# Altium PCB GCIT_1.0.PcbDoc
Units mm, origin at the board's own origin, x right, y up, seen from the top; angles counter-clockwise.
Board outline 105.03 x 70.03 mm, 2 copper layers (Top Layer, Bottom Layer); 63 components, 45 nets, 210 pads, 462 vias.
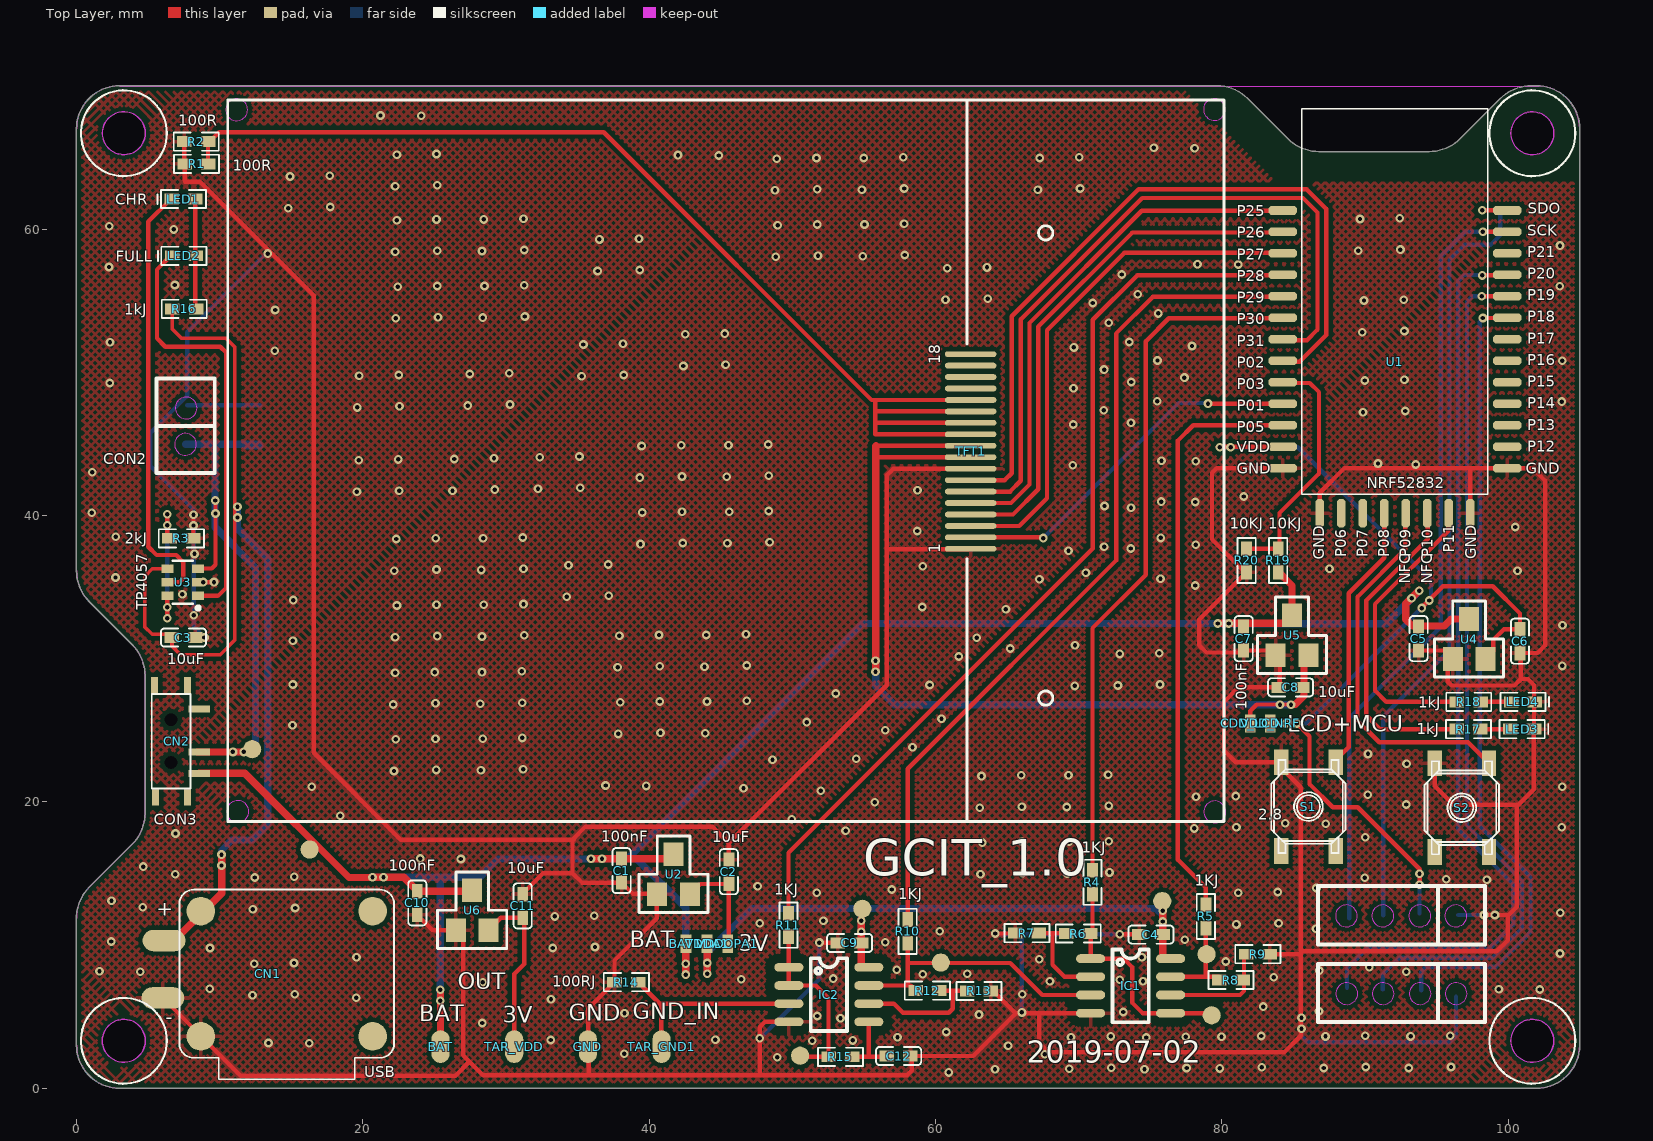
[diagram p0: Top Layer view]
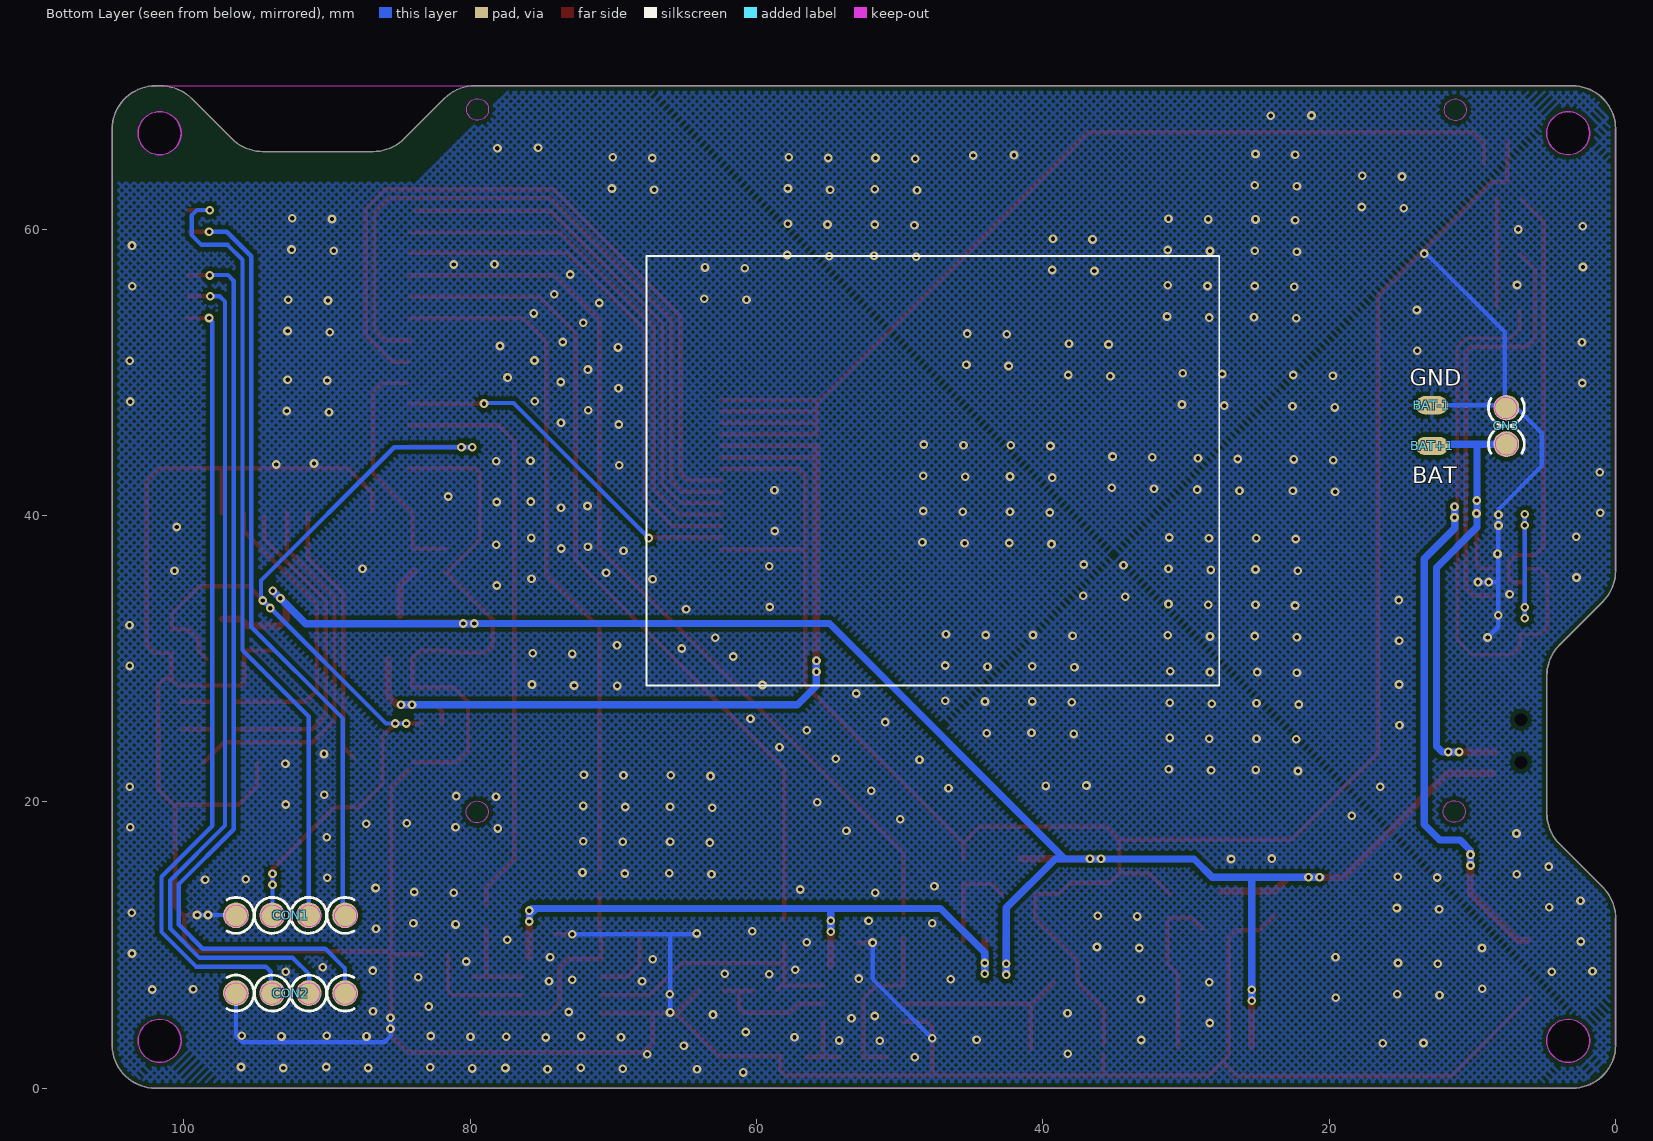
[diagram p1: Bottom Layer view, seen from below]

## Layer stack, top to bottom
Top Layer: signal copper 0.0356
Dielectric: dielectric 0.32, FR-4, Dk 4.8
Bottom Layer: signal copper 0.0356

## Board outline
-0.016,3 ccw(c2.997,3) 2.997,-0.013 101.992,-0.013 ccw(c102,-0.003) 102,-0.016 ccw(c102,2.997) 105.012,2.916 ccw(c105,2.921) 105.013,2.921 105.013,66.991 ccw(c105.004,67) 105.017,67 ccw(c102.004,67) 102.004,70.013 101.623,70.013 ccw(c101.623,66.934) 99.446,69.111 96.647,66.312 cw(c94.488,68.471) 94.488,65.418 86.789,65.418 cw(c86.789,68.471) 84.631,66.312 81.83,69.113 ccw(c79.653,66.936) 79.653,70.015 ccw(c79.653,66.936) 79.653,70.015 cw(c79.653,70.002) 79.653,70.015 3.01,70.013 ccw(c3,70.005) 3,70.018 ccw(c3,67.005) -0.013,67.005 -0.013,36.144 ccw(c3.066,36.144) 0.889,33.967 3.893,30.962 cw(c1.735,28.804) 4.788,28.804 4.788,19.202 cw(c1.735,19.202) 3.893,17.044 0.886,14.036 ccw(c3.063,11.859) -0.016,11.859
cut-out: 103.201,3.297 cw(c101.701,3.297) 101.701,1.797 cw(c101.701,3.297) 100.201,3.297 cw(c101.701,3.297) 101.701,4.797 cw(c101.701,3.297)
cut-out: 101.704,68.201 cw(c101.704,66.701) 103.204,66.701 cw(c101.704,66.701) 101.704,65.201 cw(c101.704,66.701) 100.204,66.701 cw(c101.704,66.701)
cut-out: 1.799,66.705 cw(c3.299,66.705) 3.299,68.205 cw(c3.299,66.705) 4.799,66.705 cw(c3.299,66.705) 3.299,65.205 cw(c3.299,66.705)
cut-out: 3.297,1.799 cw(c3.297,3.299) 1.797,3.299 cw(c3.297,3.299) 3.297,4.799 cw(c3.297,3.299) 4.797,3.299 cw(c3.297,3.299)

## Design rules (kind name [scope] priority, off if disabled: settings)
Clearance Clearance_1 [(InComponent('IC1') OR InComponent('IC2'))] p1: gap=0.635
Clearance [All] p2: gap=0.305
ComponentClearance [All] p1 off: gap=0.254 collisioncheckmode=3 verticalgap=0.254 showdistances=FALSE
MinimumSolderMaskSliver [All] p1 off: minsoldermaskwidth=0.254
PolygonConnect PolygonConnect_1 [isVia] p1: connectstyle=Direct reliefconductorwidth=0.254 reliefentries=4 polygonreliefangle="90 Angle"
PolygonConnect [All] p2: connectstyle=Relief reliefconductorwidth=0.254 reliefentries=4 polygonreliefangle="90 Angle"
RoutingVias [All] p1: holewidth=0.305 width=0.61 viastyle="Through Hole" minholewidth=0.305 minwidth=0.61 maxholewidth=0.305 maxwidth=0.61
SilkscreenOverComponentPads [All] p1 off: minsilkscreentomaskgap=0.254
SolderMaskExpansion [All] p1 off: expansion=0.102
Width [All] p1: maxlimit=0.762 minlimit=0.152 preferedwidth=0.305
25 further rules are at their usual default settings.

## Components (designator, comment, footprint, x,y, rotation, side; value= is the part's Value field where it differs from the comment)
BAT "" BAT_PAD#1 25.425,2.896 r0 top
BAT1 "" BAT_PAD#2 42.57,10.084 r0 top
BAT+1 "" BAT_PAD#1 12.802,44.856 r270 bottom
BAT-1 "" BAT_PAD#1 12.827,47.701 r270 bottom
C1 "100nF" 0603C 38.075,15.189 r90 top
C2 "10uF" 0603C 45.568,15.113 r270 top
C3 "10uF" 0603C 7.468,31.471 r0 top
C4 "100nF" 0603C 75.057,10.719 r0 top
C5 "100nF" 0603C 93.751,31.394 r90 top
C6 "10uF" 0603C 100.838,31.217 r90 top
C7 "100nF" 0603C 81.534,31.394 r90 top
C8 "10uF" 0603C 84.811,27.991 r0 top
C9 "100nF" 0603C 54,10.135 r0 top
C10 "100nF" 0603C 23.8,12.929 r90 top
C11 "10uF" 0603C 31.166,12.725 r270 top
C12 "10uF" 0603C 57.429,2.235 r180 top
CDD_LCD "" BAT_PAD#2 81.991,25.476 r180 top
CN1 "USB" USB 14.681,7.112 r90 top
CN2 "CON3" MSK-12C01-07 6.604,24.232 r270 top
CN3 "CON2" SIP-2P 7.62,46.253 r90 top
CON1 "CON4" SIP-4P 92.558,12.065 r180 top
CON2 "CON4" SIP-4P 92.558,6.629 r180 top
GND "" BAT_PAD#1 35.721,2.896 r0 top
IC1 "AD8629" SO-8 73.635,7.137 r270 top
IC2 "AD8629" SO-8 52.553,6.528 r270 top
LED1 "CHR" 0603LED 7.468,62.103 r180 top
LED2 "FULL" 0603LED 7.493,58.141 r180 top
LED3 "CHR" 0603LED 100.99,25.07 r0 top
LED4 "[]" 0603LED 101.041,26.975 r0 top
R1 "100R" 0603R 8.382,64.567 r0 top
R2 "100R" 0603R 8.357,66.116 r0 top
R3 "2kJ" 0603R 7.315,38.405 r0 top
R4 "1KJ" 0603R 70.968,14.376 r90 top
R5 "1KJ" 0603R 78.892,11.989 r90 top
R6 "100RJ" 0603R 69.977,10.795 r0 top
R7 "100RJ" 0603R 66.396,10.82 r0 top
R8 "100RJ" 0603R 80.645,7.544 r180 top
R9 "100RJ" 0603R 82.525,9.347 r180 top
R10 "1KJ" 0603R 58.064,10.947 r90 top
R11 "1KJ" 0603R 49.733,11.379 r90 top
R12 "100RJ" 0603R 59.436,6.807 r180 top
R13 "100RJ" 0603R 63.043,6.782 r180 top
R14 "100RJ" 0603R 38.405,7.391 r180 top
R15 "1KJ" 0603R 53.365,2.184 r0 top
R16 "1kJ" 0603R 7.518,54.432 r0 top
R17 "1kJ" 0603R 97.231,25.07 r0 top
R18 "1kJ" 0603R 97.257,26.975 r0 top
R19 "10KJ" 0603R 83.947,36.855 r270 top
R20 "10KJ" 0603R 81.737,36.855 r90 top
S1 "SW DPST" key4x4 86.055,19.66 r270 top
S2 "SW DPST" key4x4 96.774,19.583 r270 top
TAR_GND1 "" DEBUG_PAD 40.869,2.896 r180 top
TAR_VDD "" BAT_PAD#1 30.573,2.896 r180 top
TFT1 "2.8" TFT2.8-ZHA 80.162,18.618 r90 top
U1 "NRF52832" NRF52832_MODEL 92.1,43.307 r0 top
U2 "XC6206P302MR" SOT-23-S-LDO 41.707,14.935 r0 top
U3 "TP4057" SOT23-6-SMALL 7.417,35.331 r90 top
U4 "XC6206P302MR" SOT-23-S-LDO 97.282,31.369 r0 top
U5 "XC6206P302MR" SOT-23-S-LDO 84.912,31.623 r0 top
U6 "XC6206P302MR" SOT-23-S-LDO 27.635,12.421 r0 top
VDD_NRF "" BAT_PAD#2 83.388,25.476 r180 top
VDDA1 "" BAT_PAD#2 44.044,10.084 r180 top
VDDOPA1 "" BAT_PAD#2 45.491,10.084 r180 top

## Footprints (in the part's own frame and the unit in brackets; to place one, negate y for a bottom-side part, rotate by r counter-clockwise, add the part's x,y. Pads: shape width x height; smd on the part's side, far side on the other; paste and mask are expansions set on the pad)
0603C [mil]
  rect 40x30 smd: 1(-32.5,0) 2(32.5,0)
  silkscreen extent -62,-25 62,25
0603LED [mil]
  rect 40x30 smd: A(-32.5,0) K(32.5,0)
  silkscreen extent -62,-25 72,25
0603R [mil]
  rect 40x30 smd: 1(-32.5,0) 2(32.5,0)
  silkscreen extent -62,-25 62,25
BAT_PAD#1 [mil] "side_half_hole"
  oval 50x90 smd: 1(0,0)
BAT_PAD#2 [mil] "side_half_hole"
  rect 30x50 smd: 1(0,0)
DEBUG_PAD [mil] "side_half_hole"
  oval 50x90 smd: 1(0,0)
key4x4 [mm]
  rect 1.8x1 smd: 1(-3.1,1.9) 2(-3.1,-1.9) 3(3.1,1.9) 4(3.1,-1.9)
  silkscreen extent -3.25,-2.6 3.25,2.6
MSK-12C01-07 [mm]
  rect 1.2x0.5 smd: 0(-3.9,-1.15) 0(-3.9,1.15) 0(3.9,1.15) 0(3.9,-1.1)
  round 0 hole 0.9: 0(-1.5,0) 0(1.5,0)
  rect 0.5x1.5 smd: 1(-2.25,1.95) 2(0.75,1.95) 3(2.25,1.95)
  silkscreen extent -3.3,-1.35 3.3,1.35
NRF52832_MODEL [mm]
  oct 2x0.6 smd: 1(-7.85,18) 2(-7.85,16.499) 3(-7.85,14.998) 4(-7.85,13.497) 5(-7.85,11.996) 6(-7.85,10.495) 7(-7.85,8.994) 8(-7.85,7.493) 9(-7.85,5.992) 10(-7.85,4.492) 11(-7.85,2.991) 12(-7.85,1.49) 13(-7.85,-0.011) 22(7.85,0) 23(7.85,1.5) 24(7.85,3) 25(7.85,4.5) 26(7.85,6) 27(7.85,7.5) 28(7.85,9) 29(7.85,10.5) 30(7.85,12) 31(7.85,13.5) 32(7.85,15) 33(7.85,16.5) 34(7.85,18)
  oct 0.6x2 smd: 14(-5.25,-3.16) 15(-3.75,-3.16) 16(-2.25,-3.16) 17(-0.75,-3.16) 18(0.75,-3.16) 19(2.25,-3.16) 20(3.75,-3.16) 21(5.25,-3.16)
  silkscreen extent -6.5,-1.81 6.5,25.09
SIP-2P [mm]
  round 1.8 smd far side: 1(-1.27,0) 2(1.27,0)
  silkscreen extent -3.3,-2.03 3.3,2.03
SIP-4P [mm]
  round 1.8 smd far side: 1(-3.81,0) 2(-1.27,0) 3(1.27,0) 4(3.81,0)
  silkscreen extent -5.84,-2.03 5.84,2.03
SO-8 [mil]
  oval 24x80 smd: 1(-75,-110) 2(-25,-110) 3(25,-110) 4(75,-110) 5(75,110) 6(25,110) 7(-25,110) 8(-75,110)
  silkscreen extent -100,-50 100,50
SOT23-6-SMALL [mm] "SOT23, 3-Leads, Body 2.9x1.3mm, Pitch 0.95mm, Lead Span 2.4mm, IPC High Density"
  rect 0.6x0.85 smd: 1(-0.95,-1.075) 2(0,-1.075) 3(0.95,-1.075) 4(0.95,1.075) 5(0,1.075) 6(-0.95,1.075)
  silkscreen extent -1.92,-1.2 1.5,0.7, body extent -1.5,-0.7 1.5,0.7, height 1.14
SOT-23-S-LDO [mil]
  rect 55x65 smd: GND(-45,-55) Vin(0,55) Vout(45,-55)
  silkscreen extent -95,-105 95,105
TFT2.8-ZHA [mm]
  oval 0.4x3.6 smd: 1(19.05,17.704) 2(19.85,17.704) 3(20.65,17.704) 4(21.45,17.704) 5(22.25,17.704) 6(23.05,17.704) 7(23.85,17.704) 8(24.65,17.704) 9(25.45,17.704) 10(26.25,17.704) 11(27.05,17.704) 12(27.85,17.704) 13(28.65,17.704) 14(29.45,17.704) 15(30.25,17.704) 16(31.05,17.704) 17(31.85,17.704) 18(32.65,17.704)
  silkscreen extent 0,0 50.4,69.6
USB [mm]
  round 2 smd: 0(-3.503,-6) 0(5.247,-6) 1(-3.503,6) 2(5.247,6)
  oval 1.5x3 smd: 1(-0.818,8.654) 2(3.19,8.567)
  silkscreen extent -6.5,-7.5 6.75,7.5

## Part data
BAT BAT1 BAT+1 BAT-1 CDD_LCD GND TAR_GND1 TAR_VDD VDD_NRF VDDA1 VDDOPA1: library part PAD
C1 C2 C3 C4 C5 C6 C7 C8 C9 C10 C11 C12: library part C0402-47n, "Capacitor, X7R, ?0%"
CN1: library part CON2, "Connector"
CN2 CN3 CON1 CON2: "Connector"
IC1 IC2: library part LM358
LED1 LED2 LED3 LED4: library part LED
R1 R2 R3 R4 R5 R6 R7 R8 R9 R10 R11 R12 R13 R14 R15 R16 R17 R18 R19 R20: library part RES2
TFT1: library part 18P
U2 U4 U5 U6: library part 7805
U3: library part DIP6

## Free pads (board coordinates)
  round 1.27 smd: 0(12.268,23.673) 0(16.281,16.662) 0(50.546,2.261) 0(54.889,12.522) 0(60.376,8.763) 0(75.844,13.056) 0(78.943,9.347) 0(79.299,5.08)

## Via types
v1: diameter 0.61, hole 0.305, Top Layer to Bottom Layer, tented both sides, 462 vias

## Nets (pads, with @x,y where several pads share a name; then routed paths per layer and width w, separated by ;. In a path a pad name is that pad's centre, name@x,y a point inside that pad or via, vN(x,y) a via of type N, cw(c..) or ccw(c..) an arc to the next point about the centre after c; other vN are vias at no path point)
5V: C3.1 CN1.2 R16.1 U3.4 | length 76.3
  Top Layer w0.254: U3.4 5.293,36.281 4.75,35.738 4.75,32.233 5.283,31.699 6.579,31.699 6.667,31.61 6.667,30.874 7.264,30.277 10.033,30.277 11.049,31.293 11.049,51.765 10.439,52.375 7.329,52.375 6.68,53.023 R16.1@6.68,54.356
  Top Layer w0.508: CN1.2@6.114,10.302 6.822,10.302 10.135,13.614 v1@10.135,16.307
  Bottom Layer w0.508: v1(10.122,15.545) 10.122,16.599 10.846,17.323 12.268,17.323 13.36,18.415 13.36,22.758 13.36,36.982 11.227,39.116 v1@11.227,40.691
  other v1: 10.122,16.307 11.239,39.853 11.239,40.615
AD1: R11.2 U1.4 | length 64.8
  Top Layer w0.305: R11.2 49.733,16.434 70.993,37.694 70.993,53.67 74.092,56.769 U1.4@84.277,56.769
AD2: R10.2 U1.5 | length 59.6
  Top Layer w0.305: R10.2 58.064,22.301 72.619,36.855 72.619,52.705 75.184,55.27 U1.5@84.201,55.27
AD3: R4.2 U1.6 | length 48.7
  Top Layer w0.305: R4.2 70.968,32.131 74.701,35.865 74.701,52.172 76.302,53.772 U1.6@84.226,53.772
AD4: R5.2 U1.11 | length 41
  Top Layer w0.305: R5.2 78.892,13.995 76.937,15.951 76.937,45.237 78.003,46.304 U1.11@84.277,46.304
AD_BAT: R19.1 R20.2 U1.9 | length 17
  Top Layer w0.305: R20.2 84.036,37.681 84.036,40.17 86.792,42.926 86.792,48.616 86.157,49.251 U1.9@84.43,49.251
BAT: BAT1.1 BAT.1 C1.2 C5.2 C7.2 C10.2 CN2.3 pad.0@16.281,16.662 R19.2 U2.Vin U4.Vin U5.Vin U6.Vin | length 151.6
  Top Layer w0.508: CN2.3 11.75,21.982 19.025,14.707 v1@21.488,14.707 ; v1@20.65,14.732 22.86,14.732 23.838,13.754 U6.Vin@27.521,13.754 ; BAT.1 v1@25.425,6.883 ; v1@35.89,16.015 U2.Vin@41.516,16.015 ; v1@42.558,7.874 BAT1.1@42.558,10.211 ; v1@79.68,32.461 U5.Vin@84.353,32.461 ; R19.2@83.922,36.093 84.912,35.103 U5.Vin ; v1@93.802,34.773 92.862,33.833 92.862,32.741 93.32,32.283 95.555,32.283 96.037,32.766 U4.Vin
  Bottom Layer w0.508: v1@20.549,14.732 28.169,14.732 29.439,16.002 39.141,16.002 42.558,12.586 v1(42.558,7.925) ; v1(25.413,6.096) 25.413,14.668 ; 38.481,16.027 54.902,32.448 v1(80.493,32.448) ; v1@79.68,32.436 91.492,32.436 v1(93.803,34.747)
  other v1: 25.413,6.858 42.558,8.687 20.676,14.719 21.438,14.719 35.941,16.015 36.703,16.015 79.731,32.448 93.264,34.208
BAT_REAL: BAT+1.1 CN2.2 CN3.1 pad.0@12.268,23.673 U3.3 | length 39.1
  Top Layer w0.305: U3.3@8.458,36.297 9.449,36.297 9.703,36.551 v1@9.703,41.097
  Top Layer w0.508: CN2.2@8.427,23.482 v1@11.594,23.482
  Bottom Layer w0.508: CN3.1 BAT+1.1@12.751,44.983 ; 9.677,44.907 9.677,39.167 12.497,36.347 12.497,23.876 12.103,23.482 v1(10.922,23.482) ; BAT+1.1@11.811,44.856 BAT+1.1
  other v1: 11.684,23.482 9.703,40.132 9.677,41.046
GND: BAT-1.1 C1.1 C2.1 C3.2 C4.1 C5.1 C6.1 C7.1 C8.1 C9.1 C10.1 C11.1 C12.1 CN1.1 CN3.2 CON1.1 CON2.1 GND.1 IC1.4 IC2.4 LED3.K LED4.K R1.1 R2.1 R3.2 R7.1 R9.1 R13.1 R14.2 R20.1 S1.2 S2.2 TFT1.1 TFT1.8 U1.13 U1.14 U1.21 U1.22 U2.GND U3.2 U4.GND U5.GND U6.GND | length 495.9
  Top Layer w0.305: CN1.1@6.027,6.294 11.458,0.864 26.467,0.864 27.432,1.829 ; R1.1@7.531,64.529 R2.1 ; 7.556,63.411 R1.1 ; 7.569,63.322 8.609,63.322 16.561,55.371 16.561,23.419 22.631,17.348 34.722,17.348 ; R3.2@8.166,38.379 v1@8.166,39.941 ; U3.2 v1@9.703,35.331 ; C10.1@23.825,12.065 24.867,11.024 U6.GND 27,10.516 27,2.286 28.397,0.889 35.789,0.889 ; C11.1@31.115,13.538 32.588,15.011 34.646,15.011 ; GND.1@35.738,3.048 35.738,5.55 R14.2 37.579,8.903 40.538,11.862 U2.GND@40.538,13.284 ; GND.1@35.789,2.362 35.789,0.889 ; C1.1@38.024,14.351 35.306,14.351 34.646,15.011 ; C1.1 38.875,13.564 U2.GND@40.488,13.564 ; C2.1 45.568,17.12 ; 47.727,0.914 v1(47.727,3.48) 47.727,4.256 48.094,4.623 IC2.4 ; v1(51.892,10.16) C9.1@52.857,10.16 ; 56.591,37.643 TFT1.1@62.459,37.643 ; C12.1 62.636,2.235 65.608,5.207 ; C12.1@58.344,2.261 58.344,1.219 58.014,0.889 35.789,0.889 ; TFT1.8 57.06,43.268 56.591,42.799 56.591,28.143 45.568,17.12 ; R13.1@63.983,6.833 65.583,5.232 IC1.4 ; v1(64.186,10.795) R7.1@65.761,10.795 ; 67.259,5.131 67.259,3.15 67.92,2.489 84.353,2.489 85.522,3.658 85.522,21.006 S1.2@84.328,22.2 ; v1(72.873,10.744) C4.1@74.066,10.744 ; R20.1@81.483,36.17 79.324,38.329 79.324,42.977 79.643,43.296 U1.13 ; C7.1@81.509,30.429 78.943,30.429 78.435,30.937 78.435,32.728 R20.1 ; C7.1 83.502,30.569 84.049,30.023 C8.1@84.049,28.042 ; R9.1 85.471,9.347 ; C8.1 81.178,27.991 80.162,26.975 80.162,23.571 80.975,22.758 S1.2@83.998,22.758 ; 85.598,9.55 99.212,9.55 99.974,10.312 99.974,12.014 ; U1.14@86.843,40.284 86.843,41.58 88.57,43.307 U1.22 ; C5.1 95.796,30.569 95.796,28.384 96.063,28.118 100.457,28.118 100.889,28.55 C6.1@100.889,30.226 ; S2.2 94.874,21.102 96.19,19.787 100.736,19.787 101.803,20.853 LED3.K@101.803,25.095 ; U1.21 97.35,43.223 ; v1@98.171,12.09 100.051,12.09 100.609,12.649 100.609,19.736 ; U1.22@100.178,43.307 101.727,43.307 102.591,42.443 102.591,30.912 102.07,30.391 C6.1 ; 100.889,28.575 101.397,28.575 101.816,28.156 LED3.K ; 34.646,15.011 34.646,17.348 35.56,18.263 44.425,18.263 45.568,17.12
  Bottom Layer w0.305: CN3.2@7.722,47.701 BAT-1.1 ; v1(8.166,40.056) 8.166,40.424 5.156,43.434 5.156,45.771 7.722,48.336 7.722,52.807 v1@13.259,58.344 ; v1@8.179,40.056 8.179,32.22 v1(8.928,31.471) ; 8.217,35.344 v1(9.601,35.344) ; v1@47.752,3.48 51.892,7.62 51.892,9.982 v1@51.816,10.058 ; v1@64.364,10.744 v1(72.873,10.744) ; v1(66.04,5.283) 66.04,10.668 ; v1(85.573,4.902) 85.573,3.632 86.004,3.2 95.91,3.2 96.368,3.658 CON2.1@96.368,6.375 ; CON1.1@96.52,12.09 v1(99.085,12.09)
  other v1: 60.935,1.092 64.16,1.321 74.6,1.321 69.342,1.346 79.858,1.372 77.546,1.397 87.122,1.397 93.066,1.397 72.288,1.422 82.804,1.448 90.068,1.473 96.012,1.473 48.946,2.159 67.64,2.362 38.252,2.388 65.075,2.946 16.256,3.124 13.411,3.15 51.384,3.302 54.229,3.327 33.122,3.353 44.628,3.378 74.727,3.531 57.353,3.556 69.469,3.556 77.495,3.581 79.985,3.581 72.238,3.607 87.249,3.607 93.193,3.607 82.753,3.632 90.018,3.658 95.961,3.658 60.757,3.912 85.573,4.14 28.346,4.547 53.365,4.877 51.74,5.029 63.043,5.131 38.278,5.232 73.127,5.309 86.792,5.359 82.906,5.69 33.147,6.198 19.533,6.299 12.294,6.477 15.24,6.553 66.065,6.553 102.21,6.883 99.365,6.909 9.296,6.934 28.372,7.391 67.996,7.468 74.498,7.468 72.873,7.569 46.431,7.595 52.857,7.645 83.642,7.747 59.106,7.95 62.23,7.976 4.445,8.128 92.888,8.128 1.6,8.153 86.817,8.204 57.302,8.255 90.297,8.433 12.421,8.687 15.189,8.738 80.289,8.839 67.259,8.992 19.558,9.144 74.422,9.144 103.632,9.398 9.322,9.779 33.274,9.779 36.22,9.855 56.49,10.185 2.413,10.236 77.419,10.363 60.3,10.947 86.589,11.125 81.026,11.43 47.727,11.506 83.972,11.506 52.172,11.684 33.401,11.989 36.17,12.04 98.323,12.09 103.657,12.243 12.319,12.497 15.265,12.573 4.623,12.624 2.438,13.081 51.714,13.64 81.153,13.64 83.922,13.691 56.947,13.868 86.614,13.97 47.574,14.097 98.527,14.554 95.682,14.58 89.992,14.681 12.446,14.707 15.215,14.757 6.883,14.935 63.144,14.935 69.215,14.986 66.091,15.011 72.161,15.062 4.648,15.469 26.848,16.002 24.003,16.027 63.271,17.145 66.04,17.196 69.342,17.196 72.111,17.247 90.018,17.526 6.909,17.78 53.723,17.971 78.08,18.136 81.026,18.212 103.759,18.212 87.274,18.466 84.43,18.491 49.964,18.784 18.415,19.025 63.094,19.583 69.164,19.634 66.04,19.66 72.111,19.71 92.888,19.812 55.753,19.964 78.207,20.345 80.975,20.396 90.195,20.498 51.994,20.777 46.586,20.943 16.421,21.054 103.784,21.057 39.802,21.107 36.957,21.133 63.221,21.793 65.989,21.844 69.291,21.844 72.06,21.895 22.174,22.149 28.245,22.2 25.121,22.225 31.191,22.276 92.913,22.657 48.616,22.936 54.46,23 90.221,23.343 58.397,23.813 22.301,24.359 25.07,24.409 28.372,24.409 31.14,24.46 37.846,24.74 43.917,24.79 40.792,24.816 56.49,24.994 15.088,25.349 51.006,25.565 60.427,25.806 22.123,26.797 28.194,26.848 25.07,26.873 31.14,26.924 37.973,26.949 40.742,27 44.044,27 46.812,27.051 53.035,27.559 69.723,28.092 72.746,28.118 59.591,28.156 15.113,28.194 75.692,28.194 22.25,29.007 25.019,29.058 28.321,29.058 31.09,29.108 37.795,29.388 43.866,29.439 40.742,29.464 103.784,29.489 46.812,29.515 61.62,30.15 72.873,30.328 75.641,30.378 65.227,30.709 69.748,30.937 15.113,31.242 62.893,31.458 22.25,31.496 28.321,31.547 25.197,31.572 37.922,31.598 31.267,31.623 40.691,31.648 43.993,31.648 46.761,31.699 103.81,32.334 8.179,33.02 64.922,33.452 59.08,33.604 22.377,33.706 25.146,33.757 28.448,33.757 31.217,33.807 15.138,34.087 34.239,34.315 37.186,34.392 7.391,34.493 78.156,35.103 8.839,35.344 67.262,35.548 75.717,35.585 2.718,35.662 70.51,35.992 22.2,36.144 100.66,36.144 28.27,36.195 25.146,36.22 31.217,36.271 87.528,36.271 59.106,36.449 34.366,36.525 37.135,36.576 8.241,37.314 69.291,37.541 73.635,37.694 71.78,37.821 78.181,37.948 39.395,37.998 45.466,38.049 42.342,38.075 48.412,38.125 22.327,38.354 25.095,38.405 28.397,38.405 75.743,38.43 31.166,38.456 2.743,38.506 58.725,38.913 100.508,39.192 8.166,39.294 1.067,40.183 39.522,40.208 42.291,40.259 45.593,40.259 48.362,40.31 73.66,40.538 71.806,40.665 78.156,40.945 75.768,40.97 81.534,41.326 19.583,41.656 22.53,41.732 26.264,41.732 58.75,41.758 29.21,41.808 32.233,41.859 35.179,41.935 39.345,42.647 45.415,42.697 42.291,42.723 48.362,42.774 1.092,43.028 69.596,43.51 93.563,43.562 90.913,43.626 78.181,43.79 75.794,43.815 19.71,43.866 22.479,43.917 26.391,43.942 29.159,43.993 32.36,44.069 35.128,44.12 39.472,44.856 42.24,44.907 45.542,44.907 48.311,44.958 69.621,46.355 73.66,46.482 89.865,47.219 92.812,47.295 71.755,47.346 19.609,47.549 22.555,47.625 27.33,47.676 30.277,47.752 103.759,47.955 75.489,47.981 69.647,48.895 2.311,49.251 73.685,49.327 89.992,49.428 92.761,49.479 77.394,49.632 35.281,49.733 19.736,49.759 22.504,49.809 38.227,49.809 27.457,49.886 30.226,49.936 71.78,50.19 42.393,50.444 45.339,50.521 103.784,50.8 75.514,50.825 13.843,51.511 69.672,51.74 77.927,51.841 35.408,51.943 38.176,51.994 2.337,52.095 73.533,52.121 42.52,52.654 45.288,52.705 89.814,52.807 92.761,52.883 72.111,53.467 22.301,53.772 28.372,53.823 25.248,53.848 31.318,53.899 75.563,54.114 13.868,54.356 70.993,54.839 89.941,55.016 60.706,55.067 92.71,55.067 63.652,55.143 74.14,55.461 22.428,55.982 103.607,56.007 25.197,56.032 28.499,56.032 31.267,56.083 6.87,56.097 73.023,56.832 36.398,57.074 39.345,57.15 60.833,57.277 63.602,57.328 2.261,57.353 81.153,57.531 78.308,57.556 48.844,58.064 54.915,58.115 51.791,58.141 57.861,58.191 13.36,58.293 22.25,58.42 28.321,58.471 25.197,58.496 89.535,58.496 31.267,58.547 92.481,58.572 103.632,58.852 36.525,59.284 39.294,59.334 6.793,59.983 2.286,60.198 48.971,60.274 51.74,60.325 55.042,60.325 57.81,60.376 22.377,60.63 25.146,60.681 28.448,60.681 89.662,60.706 31.217,60.731 92.431,60.757 14.783,61.468 17.729,61.544 48.793,62.713 54.864,62.763 67.158,62.763 51.74,62.789 57.81,62.84 70.104,62.84 22.25,62.992 25.197,63.068 14.91,63.678 17.678,63.729 48.92,64.922 51.689,64.973 54.991,64.973 67.285,64.973 57.76,65.024 70.053,65.024 44.856,65.151 42.012,65.176 22.377,65.202 25.146,65.253 78.105,65.659 75.26,65.684 24.079,67.92 21.234,67.945
IO_CHRG: LED2.K U3.1 | length 30.2
  Top Layer w0.305: LED2.K@6.655,58.217 5.613,57.175 5.613,53.264 5.613,52.375 6.198,51.791 10.033,51.791 10.465,51.359 10.465,48.336 ; U3.1 9.87,34.381 10.465,34.976 10.465,48.412
IO_STANDBY: LED1.K U3.5 | length 30.2
  Top Layer w0.305: U3.5 7.188,35.331 7.442,35.585 7.442,36.754 6.96,37.236 5.588,37.236 5.004,37.821 5.004,60.528 LED1.K@6.553,62.078
K1: S1.1 U1.17 | length 18.5
  Top Layer w0.305: S1.1@88.087,23.038 88.875,23.825 88.875,34.565 91.35,37.041 U1.17
K2: S2.1 U1.18 | length 26.4
  Top Layer w0.305: U1.18@92.812,40.234 92.812,37.64 89.484,34.312 89.484,25.679 91.008,24.155 97.202,24.155 S2.1
L1: R17.1 U1.19 | length 22.4
  Top Layer w0.305: U1.19@94.386,39.929 94.386,38.353 90.094,34.06 90.094,26.035 91.059,25.07 R17.1
L2: R18.1 U1.20 | length 20.6
  Top Layer w0.305: U1.20@95.834,40.157 95.834,38.938 90.703,33.807 90.703,27.762 91.491,26.975 R18.1
LCD_CS: TFT1.5 U1.1 | length 36.5
  Top Layer w0.305: TFT1.5 65.276,40.868 66.573,42.165 66.573,53.445 74.419,61.29 U1.1@83.845,61.29
LCD_RESET: TFT1.2 U1.10 | length 25.9
  Top Layer w0.305: TFT1.2 v1@67.653,38.468 ; v1@78.973,47.799 U1.10
  Bottom Layer w0.305: v1(67.539,38.418) 76.975,47.854 v1@79.019,47.854
  other v1: 79.045,47.816
LCD_RS: TFT1.4 U1.2 | length 36.6
  Top Layer w0.305: TFT1.4 65.417,40.068 67.183,41.834 67.183,53.192 73.757,59.766 U1.2@84.201,59.766
LCD_SCL: TFT1.3 U1.3 | length 36.6
  Top Layer w0.305: TFT1.3 65.862,39.268 67.793,41.199 67.793,52.94 73.197,58.344 U1.3@84.252,58.344
LCD_SDA: TFT1.6 U1.7 | length 50.8
  Top Layer w0.305: TFT1.6 65.214,41.668 65.964,42.418 65.964,53.697 74.446,62.179 85.676,62.179 86.69,61.165 86.69,52.984 85.954,52.248 U1.7@84.176,52.248
LCD_SDO: TFT1.7 U1.8 | length 52.8
  Top Layer w0.305: TFT1.7 64.846,42.468 65.329,42.951 65.329,53.924 74.193,62.789 85.928,62.789 87.3,61.417 87.3,52.603 85.446,50.749 U1.8@84.303,50.749
LED_K: R1.2 R2.2 TFT1.11 TFT1.12 TFT1.13 TFT1.14 | length 85.1
  Top Layer w0.305: R1.2@9.182,64.554 R2.2 ; R2.2@9.246,66.065 9.957,66.777 36.83,66.777 55.538,48.068 TFT1.14 ; 55.805,47.268 TFT1.13 ; 55.805,48.005 55.805,45.668 TFT1.11 ; 55.843,46.468 TFT1.12
NetC12_2: C12.2 IC2.5 R15.2 | length 4.7
  Top Layer w0.305: R15.2 C12.2@56.49,2.184 ; 55.347,2.184 IC2.5
NetIC1_2: IC1.2 R6.1 R7.2 | length 7
  Top Layer w0.305: R7.2 R6.1@69.113,10.82 ; 68.174,10.693 68.174,8.611 69.012,7.772 IC1.2
NetIC1_6: IC1.6 R8.1 R9.2 | length 7.8
  Top Layer w0.305: IC1.6 81.28,6.502 81.559,6.782 R9.2@81.559,9.322
NetIC1_7: IC1.7 pad.0@78.943,9.347 R5.1 R8.2 | length 6.7
  Top Layer w0.305: IC1.7 R8.2@79.781,7.772 ; 78.892,7.849 R5.1
NetIC2_3: IC2.3 R14.1 TAR_GND1.1 | length 14.3
  Top Layer w0.305: R14.1 40.843,5.779 TAR_GND1.1@40.843,2.718 ; 40.767,5.893 IC2.3
NetIC2_6: IC2.6 R12.1 R13.2 | length 9.4
  Top Layer w0.305: IC2.6 57.099,5.893 57.734,5.258 60.935,5.258 61.214,5.537 61.214,6.706 ; R12.1 R13.2@62.281,6.807
NetLED1_A: LED1.A LED2.A R16.2 | length 7.5
  Top Layer w0.305: R16.2@8.293,54.572 LED1.A
NetLED3_A: LED3.A R17.2 | length 2.1
  Top Layer w0.305: R17.2 LED3.A@100.152,25.07
NetLED4_A: LED4.A R18.2 | length 2.1
  Top Layer w0.305: R18.2 LED4.A@100.228,26.975
NetR3_1: R3.1 U3.6 | length 10.2
  Top Layer w0.305: R3.1@6.337,38.405 v1@6.337,39.967 ; v1@6.342,33.003 U3.6
  Bottom Layer w0.305: v1(6.337,32.817) v1@6.337,40.107
  other v1: 6.337,33.579 6.337,39.319 6.337,40.081
OUT1: IC2.1 IC2.2 pad.0@50.546,2.261 R11.1 R15.1 | length 12.2
  Top Layer w0.305: IC2.2 51.638,7.163 52.527,6.274 R15.1@52.527,2.108 ; IC2.2@49.759,7.188 IC2.1 R11.1@49.759,10.49 ; pad.0@50.902,2.184 R15.1
OUT2: IC1.3 IC2.7 pad.0@60.376,8.763 R10.1 R12.2 | length 19.9
  Top Layer w0.305: IC2.7 58.268,7.163 R12.2@58.572,6.858 ; 58.064,7.214 R10.1 ; 58.09,8.738 65.227,8.738 67.462,6.502 IC1.3
OUT3: IC1.1 IC1.5 pad.0@79.299,5.08 R4.1 R6.2 | length 15.9
  Top Layer w0.305: IC1.1 R6.2@70.841,10.77 ; IC1.1@70.891,9.042 73.152,9.042 73.736,8.458 73.736,5.969 74.473,5.232 IC1.5 pad.0@79.273,5.232 ; R6.2@70.968,10.795 R4.1
SCK: CON1.4 U1.33 | length 53.9
  Top Layer w0.305: v1(98.247,59.817) U1.33@99.619,59.817
  Bottom Layer w0.305: CON1.4@88.9,11.862 88.9,25.806 95.301,32.207 95.301,58.114 97.004,59.817 v1@98.171,59.817
SDO: CON1.3 U1.34 | length 56.3
  Top Layer w0.305: v1(98.196,61.316) U1.34@99.72,61.316
  Bottom Layer w0.305: CON1.3 91.288,25.959 95.91,30.582 95.91,57.861 96.952,58.903 98.781,58.903 99.466,59.588 99.466,60.96 99.085,61.341 v1@98.196,61.341
TEST1: CON2.4 U1.31 | length 64.1
  Top Layer w0.305: v1(98.196,56.769) U1.31@99.72,56.769
  Bottom Layer w0.305: CON2.4@88.748,7.01 88.748,8.357 90.119,9.728 98.682,9.728 100.355,11.402 100.355,14.249 96.52,18.085 96.52,56.388 96.926,56.794 v1@98.146,56.794
TEST2: CON2.3 U1.30 | length 60.2
  Top Layer w0.305: v1(98.171,55.321) U1.30@99.695,55.321
  Bottom Layer w0.305: CON2.3@91.237,6.883 91.237,7.925 92.405,9.093 98.909,9.093 100.965,11.149 100.965,14.502 97.13,18.337 97.13,54.94 97.511,55.321 v1(98.171,55.321)
TEST3: CON2.2 U1.29 | length 56
  Top Layer w0.305: v1(98.247,53.797) U1.29@99.771,53.797
  Bottom Layer w0.305: CON2.2@93.929,6.833 93.929,8.128 94.285,8.484 99.162,8.484 101.575,10.897 101.575,14.754 98.019,18.31 98.019,53.518 v1@98.247,53.746
VDD_EX: C11.2 TAR_VDD.1 U6.Vout | length 11.7
  Top Layer w0.305: U6.Vout@28.829,11.1 29.629,11.9 C11.2 ; TAR_VDD.1 30.573,7.967 31.267,8.661 C11.2@31.267,11.684
VDD_LCD: C8.2 CDD_LCD.1 TFT1.9 TFT1.10 U5.Vout | length 68
  Top Layer w0.305: 55.828,44.068 TFT1.9 ; 55.841,44.868 TFT1.10 ; CDD_LCD.1 81.991,26.34 82.448,26.797 85.141,26.797
  Top Layer w0.508: v1@55.829,29.083 55.829,44.856 55.841,44.868 ; 85.141,26.797 85.75,27.407 U5.Vout@85.75,29.921
  Bottom Layer w0.508: v1@55.829,29.921 55.829,28.092 57.137,26.784 v1(84.836,26.784)
  other v1: 84.074,26.784 55.816,29.083 55.817,29.845
VDD_NRF: C6.2 CON1.2 U1.12 U4.Vout VDD_NRF.1 | length 71.9
  Top Layer w0.305: v1@79.714,44.797 U1.12 ; VDD_NRF.1 v1@85.319,25.476 ; v1(85.242,25.463) 86.131,24.575 86.131,21.234 87.756,19.61 89.508,19.61 93.828,15.291 v1@93.828,14.122 ; v1@93.878,33.477 95.453,35.052 98.933,35.052 100.838,33.147 C6.2 ; U4.Vout 98.958,30.505 98.958,31.293 99.72,32.055 C6.2@100.838,32.055
  Bottom Layer w0.305: v1(79.858,44.768) 85.306,44.768 94.615,35.458 v1@94.615,34.138 ; v1(84.48,25.463) 85.89,25.463 v1@94.463,34.036 ; CON1.2@93.815,12.192 v1(93.815,14.961)
  other v1: 93.815,14.199 93.98,33.528 94.488,34.061 80.62,44.767
VDD_OPA: C2.2 U2.Vout VDDOPA1.1 | length 7
  Top Layer w0.305: U2.Vout 43.561,14.249 C2.2@45.517,14.249 ; VDDOPA1.1@45.568,10.287 C2.2
VDDA: C4.2 C9.2 IC1.8 IC2.8 pad.0@54.889,12.522 pad.0@75.844,13.056 VDDA1.1 | length 46.5
  Top Layer w0.508: v1@44.056,7.925 VDDA1.1@44.056,10.262 ; IC2.8@54.826,8.522 v1@54.826,11.786 ; IC1.8@75.882,9.131 v1@75.882,12.421
  Bottom Layer w0.508: v1(44.056,7.976) 44.056,9.461 47.142,12.548 54.813,12.548 ; v1@54.813,10.897 54.813,12.548 ; 75.463,12.497 75.87,12.09 ; v1@75.87,11.608 75.87,12.09 ; 54.813,12.548 75.717,12.548 75.87,12.395 75.87,12.09
  other v1: 44.056,8.738 54.826,10.922 75.882,11.633 54.826,11.684 75.883,12.395
pads on no net: CN1.0 CN2.0 CN2.1 S1.3 S1.4 S2.3 S2.4 TFT1.15 TFT1.16 TFT1.17 TFT1.18 U1.15 U1.16 U1.23 U1.24 U1.25 U1.26 U1.27 U1.28 U1.32

## Polygon pours and split planes (outlines as drawn)
GND on Top Layer "Bottom Layer-No Net" (hatched 45Degree grid 0.406 track 0.2, remove dead copper): -7.163,84.968 -7.391,84.74 -7.391,-13.076 121.412,-13.076 129.083,-5.405 124.892,-1.214 124.892,84.968
GND on Bottom Layer "Bottom Layer-No Net" (hatched 45Degree grid 0.4 track 0.2, remove dead copper): -6.155,84.693 -6.384,84.464 -6.384,-13.351 122.42,-13.351 130.09,-5.68 125.899,-1.489 125.899,84.693

## Keep-outs
Keep-Out Layer:
  circle w0.025: c7.607,44.971 r0.762
  circle w0.025: c7.658,47.511 r0.762
  circle w0.025: c3.3,3.3 r1.5
  circle w0.025: c3.3,66.702 r1.5
  circle w0.025: c101.701,66.7 r1.5
  circle w0.025: c101.7,3.3 r1.5
  circle w0.025: c96.355,12.027 r0.762
  circle w0.025: c93.84,12.027 r0.762
  circle w0.025: c91.249,12.027 r0.762
  circle w0.025: c88.709,12.027 r0.762
  circle w0.025: c79.515,19.291 r0.762
  circle w0.025: c11.265,19.317 r0.762
  circle w0.025: c11.189,68.339 r0.762
  circle w0.025: c79.489,68.364 r0.762
  circle w0.025: c88.735,6.591 r0.762
  circle w0.025: c91.275,6.591 r0.762
  circle w0.025: c93.866,6.591 r0.762
  circle w0.025: c96.38,6.591 r0.762
  lines w0.025: 3,70 102.133,70 ; 3,70.005 ccw(c3,67.005) 0,67.005 0,36.144 ccw(c3.066,36.144) 0.898,33.976 2.743,32.131 3.903,30.972 cw(c1.735,28.804) 4.801,28.804 4.801,26.162 4.801,19.202 cw(c1.735,19.202) 3.903,17.034 2.184,15.316 0.895,14.027 ccw(c3.063,11.859) -0.003,11.859 -0.003,3 ccw(c2.997,3) 2.997,0 102,0 ; 102,-0.003 ccw(c102,2.997) 105,2.997 ; 102.004,70 cw(c102.004,67) 105.004,67 ; 105,2.921 105,67.081

## Other copper
Top Layer:
  pour cut-out: 76.124,70.891 83.769,63.246 106.985,63.246 107.518,63.779 107.518,71.907 107.213,72.212
Bottom Layer:
  pour cut-out: 76.124,70.866 83.769,63.221 106.985,63.221 107.518,63.754 107.518,71.882 107.213,72.187

## Silkscreen, mask and mechanical layers (free items; w line width, h text height)
Top Overlay:
  circle w0.152: c101.7,3.3 r3
  circle w0.152: c101.701,66.7 r3
  circle w0.152: c3.3,66.702 r3
  circle w0.152: c3.3,3.3 r3
  text "LCD+MCU" at 84.582,24.892 h1.14
  text "GCIT_1.0" at 54.966,14.834 h2.54
  text "BAT" at 38.633,9.83 h1.14
  text "3V" at 46.253,9.55 h1.14
  text "OUT" at 26.619,6.883 h1.14
  text "GND_IN" at 38.862,4.801 h1.14
  text "GND" at 34.392,4.699 h1.14
  text "BAT" at 23.952,4.648 h1.14
  text "3V" at 29.769,4.547 h1.14
  text "2019-07-02" at 66.37,1.753 h1.52
Bottom Overlay:
  lines w0.127: 27.679,28.116 67.679,28.116 67.679,58.116 27.679,58.116 27.679,28.116
  text "GND" at 14.351,49.073 h1.14
  text "BAT" at 14.199,42.24 h1.14
Mechanical 1:
  circle w0.025: c3.3,3.3 r1.5
  circle w0.025: c3.3,66.702 r1.5
  circle w0.025: c101.701,66.7 r1.5
  circle w0.025: c101.7,3.3 r1.5
  lines w0.025: -2.676,69.909 -1.66,69.911 ; -2.672,68.385 -2.168,69.91 ; -2.502,1.379 -1.99,-0.143 ; -2.498,-0.145 -1.482,-0.142 ; -2.101,43.478 -2.168,69.91 ; -2.057,26.289 -1.99,-0.143 ; -1.656,68.387 -2.168,69.91 ; -1.486,1.382 -1.99,-0.143 ; -0.077,-3.937 -0.076,-2.921 ; 1.447,-3.938 -0.076,-3.429 ; 1.448,-2.922 -0.076,-3.429 ; 3,70 79.653,70.002 cw(c79.653,66.936) 81.821,69.104 84.621,66.303 ccw(c86.789,68.471) 86.789,65.405 91.923,65.405 94.488,65.405 ccw(c94.488,68.471) 96.656,66.303 99.339,68.986 99.455,69.102 cw(c101.623,66.934) 101.623,70 102.004,70 cw(c102.004,67) 105.004,67 ; 3,70.005 ccw(c3,67.005) 0,67.005 0,36.144 ccw(c3.066,36.144) 0.898,33.976 2.743,32.131 3.903,30.972 cw(c1.735,28.804) 4.801,28.804 4.801,26.162 4.801,19.202 cw(c1.735,19.202) 3.903,17.034 2.184,15.316 0.895,14.027 ccw(c3.063,11.859) -0.003,11.859 -0.003,3 ccw(c2.997,3) 2.997,0 102,0 ; 43.349,-3.471 -0.076,-3.429 ; 61.575,-3.489 105,-3.531 ; 102,-0.003 ccw(c102,2.997) 105,2.997 ; 103.476,-4.037 105,-3.531 ; 103.476,-3.021 105,-3.531 ; 105,-4.039 105,-3.023 ; 105,2.921 105,67.081
  text "70.05343 (mm)" at -3.287,43.221 h1.52 r270.15
  text "105.07625 (mm)" at 43.602,-4.658 h1.52 r359.94
  text "OUTLINE: Mechanical1" at 43.698,-14.227 h1.52

## Text inside footprints (layer, text, board x,y; h text height)
CN1: Top Overlay "-" at 6.731,5.215 h1.02 r180; Top Overlay "+" at 6.751,12.908 h1.02 r180
TFT1: Top Overlay "1" at 60.35,37.363 h0.8 r90; Top Overlay "18" at 60.35,50.571 h0.8 r90
U1: Top Overlay "NFC" at 94.704,35.212 h0.76 r90; Top Overlay "NFC" at 93.175,35.242 h0.76 r90; Top Overlay "P25" at 81.059,60.896 h0.76; Top Overlay "P29" at 81.039,54.856 h0.76; Top Overlay "P28" at 81.039,56.366 h0.76; Top Overlay "P26" at 81.039,59.386 h0.76; Top Overlay "P27" at 81.039,57.876 h0.76; Top Overlay "P03" at 81.039,48.816 h0.76; Top Overlay "P02" at 81.039,50.326 h0.76; Top Overlay "P30" at 81.039,53.346 h0.76; Top Overlay "P31" at 81.039,51.836 h0.76; Top Overlay "P05" at 81.039,45.796 h0.76; Top Overlay "P01" at 81.039,47.306 h0.76; Top Overlay "VDD" at 81.051,44.425 h0.76; Top Overlay "GND" at 81.051,42.901 h0.76; Top Overlay "GND" at 101.244,42.926 h0.76; Top Overlay "P12" at 101.359,44.456 h0.76; Top Overlay "P14" at 101.359,47.476 h0.76; Top Overlay "P13" at 101.359,45.966 h0.76; Top Overlay "P17" at 101.359,52.006 h0.76; Top Overlay "P18" at 101.359,53.517 h0.76; Top Overlay "P16" at 101.359,50.496 h0.76; Top Overlay "P15" at 101.359,48.986 h0.76; Top Overlay "P21" at 101.359,58.047 h0.76; Top Overlay "SCK" at 101.359,59.557 h0.76; Top Overlay "P20" at 101.359,56.537 h0.76; Top Overlay "P19" at 101.359,55.027 h0.76; Top Overlay "SDO" at 101.379,61.067 h0.76; Top Overlay "P11" at 96.241,37.389 h0.76 r90; Top Overlay "P10" at 94.731,37.071 h0.76 r90; Top Overlay "GND" at 97.79,36.957 h0.76 r90; Top Overlay "P07" at 90.2,37.071 h0.76 r90; Top Overlay "P06" at 88.69,37.071 h0.76 r90; Top Overlay "P08" at 91.711,37.071 h0.76 r90; Top Overlay "P09" at 93.221,37.071 h0.76 r90; Top Overlay "GND" at 87.147,36.906 h0.76 r90